# Altium PCB BTN7971b.PcbDoc
Units mil, origin at the board's own origin, x right, y up, seen from the top; angles counter-clockwise.
Board outline 1875.64 x 1422.35 mil, 2 copper layers (Top Layer, Bottom Layer); 32 components, 20 nets, 103 pads, 496 vias.
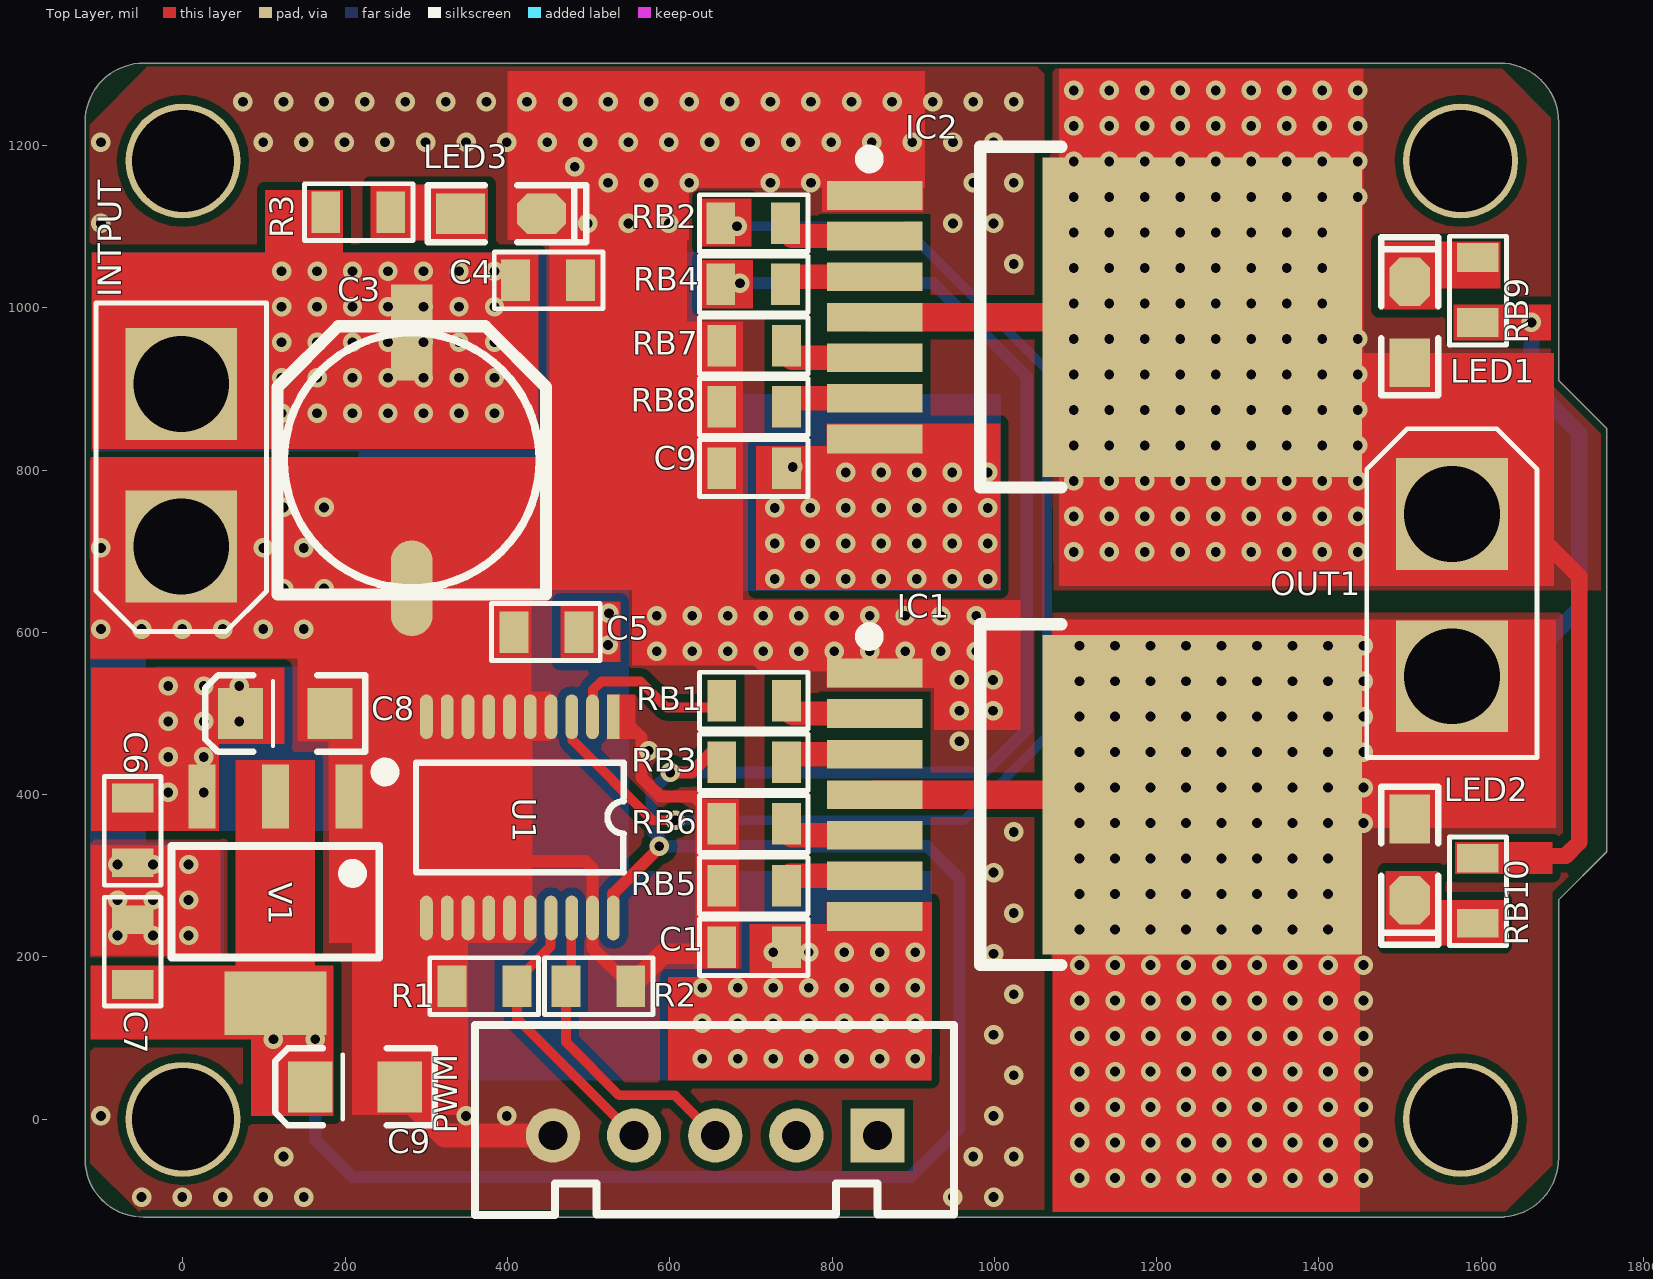
[diagram p0: Top Layer view]
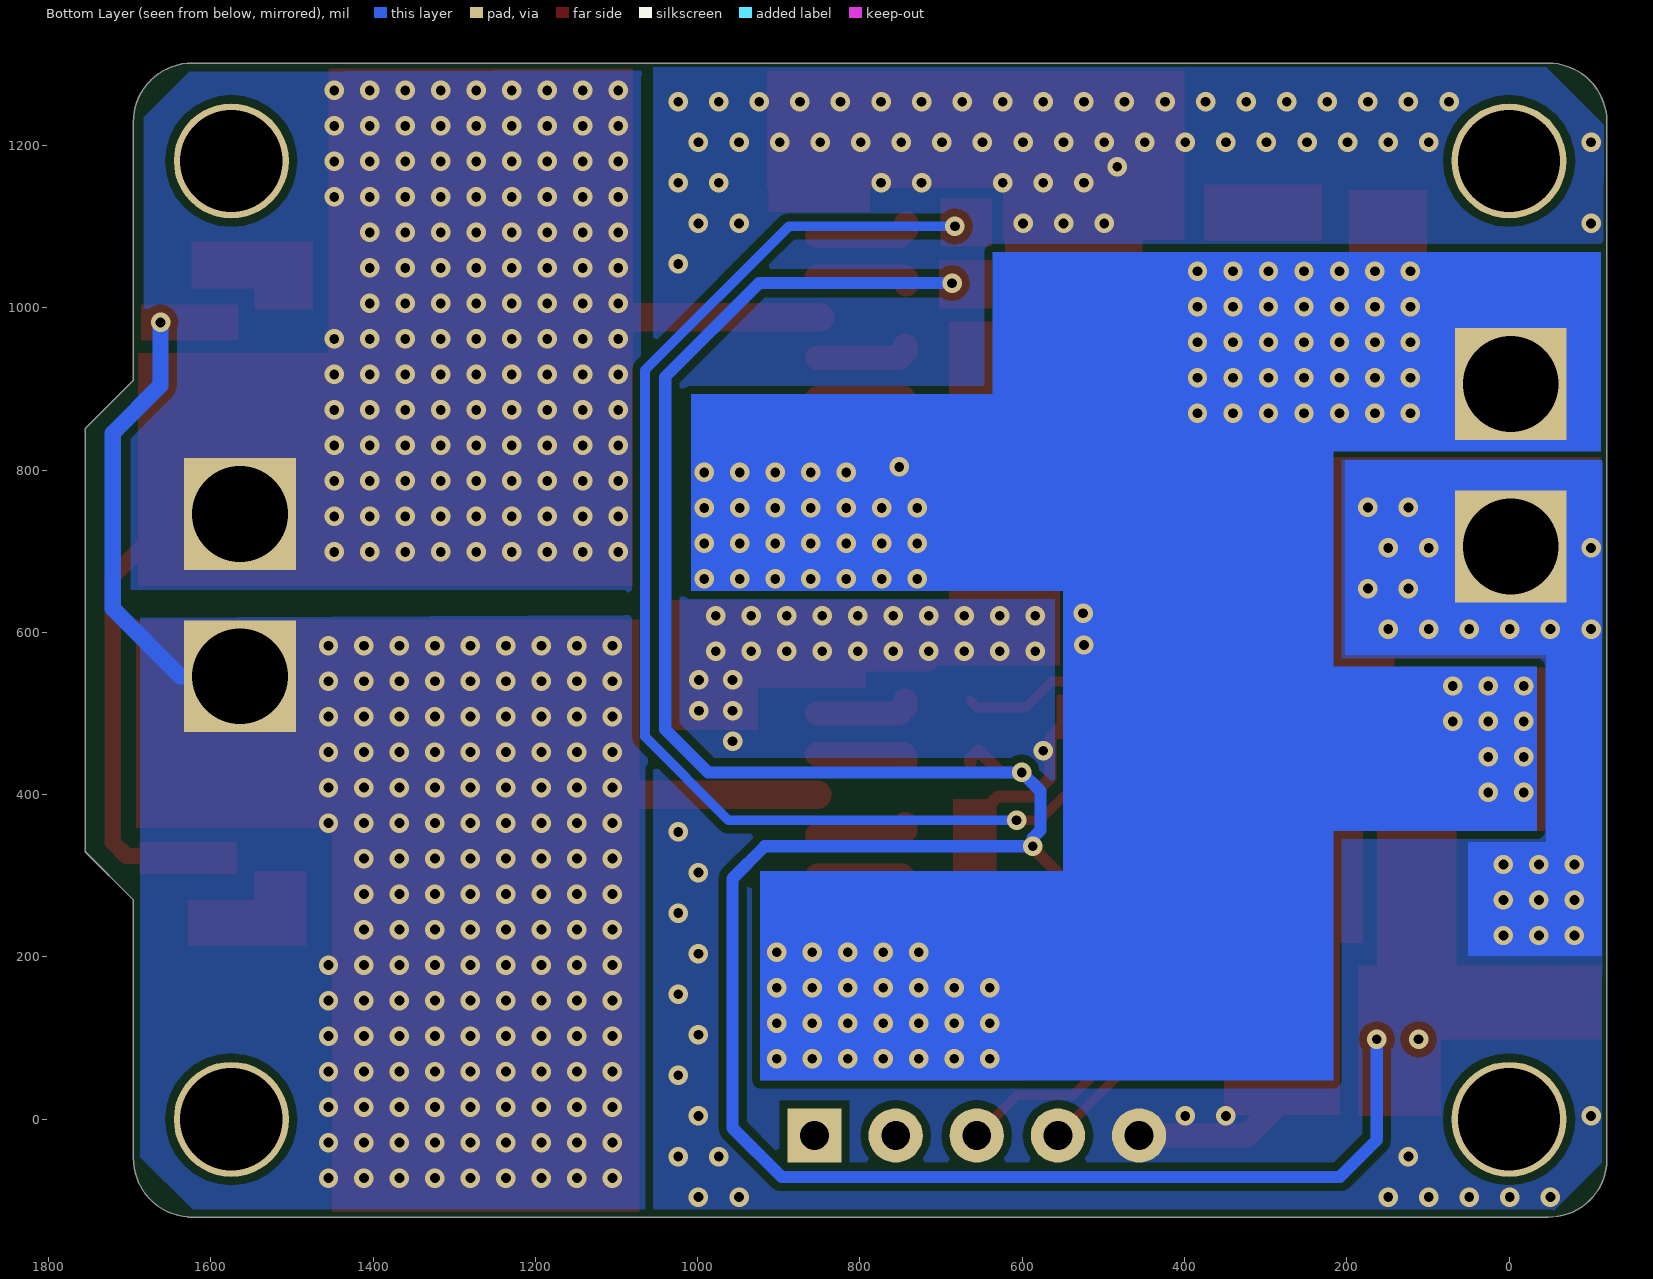
[diagram p1: Bottom Layer view, seen from below]
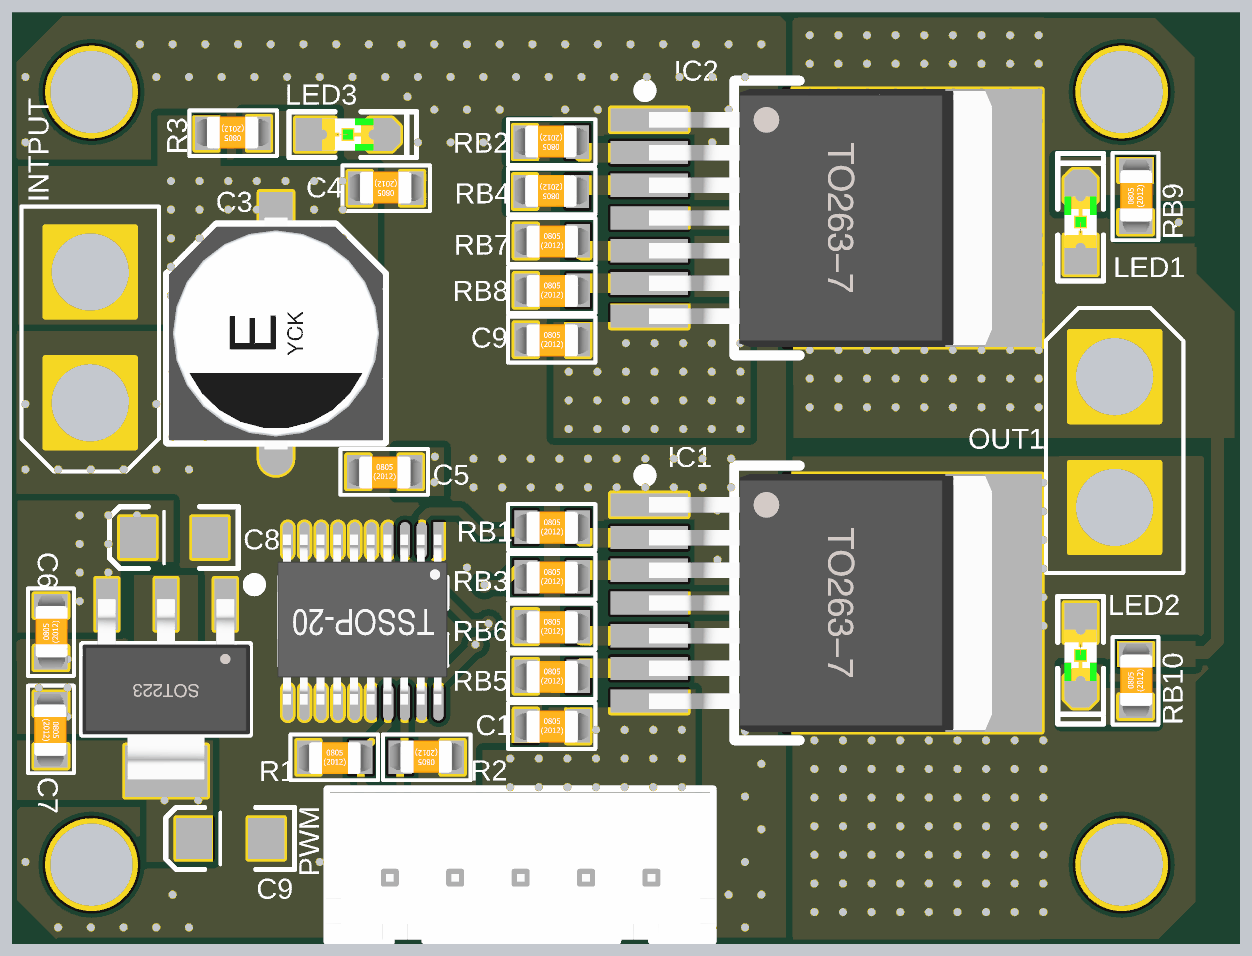
[diagram p2: 3D render of the assembled board from above, using the file's embedded part models]

## Layer stack, top to bottom
Top Solder: solder mask 0.4, Solder Resist, Dk 3.5
Top Layer: signal copper 1.4
Dielectric 1: dielectric 12.6, FR-4, Dk 4.8
Bottom Layer: signal copper 1.4
Bottom Solder: solder mask 0.4, Solder Resist, Dk 3.5

## Board outline
-48,-120.63 -47.98,-120.63 1622.67,-120.63 1627.69,-120.63 ccw(c1627.69,-118.11) 1628.8,-120.37 ccw(c1622.69,-47.89) 1695.43,-47.89 1695.43,270.29 1754.28,329.14 ccw(c1752.5,330.92) 1755.02,330.92 1755.02,850.19 ccw(c1752.5,850.19) 1754.28,851.96 1695.43,910.81 1695.43,1228.99 ccw(c1622.75,1229.05) 1695.43,1229.05 ccw(c1622.75,1229.05) 1622.81,1301.73 ccw(c1622.8,1299.21) 1622.8,1301.73 -47.89,1301.73 ccw(c-47.89,1228.99) -120.63,1228.99 -120.63,-50 ccw(c-118.11,-50) -120.62,-50.04 ccw(c-49,-49) -47.98,-120.63 ccw(c-49,-49)

## Design rules (kind name [scope] priority, off if disabled: settings)
Clearance [All] p1: gap=10 ignorepadtopadclearanceinfootprint=TRUE except(0: Arc-Hole Track-Hole SMDPad-Hole THPad-Hole Via-Hole Fill-Hole Poly-Hole Region-Hole Text-Hole)
DiffPairsRouting [All] p1: maxlimit=10 minlimit=8 mostfreqgap=10 toplayer_minwidth=15 toplayer_maxwidth=15 toplayer_prefwidth=15 bottomlayer_minwidth=15 bottomlayer_maxwidth=15 bottomlayer_prefwidth=15 maxuncoupledlength=500
PlaneClearance [All] p1: clearance=30
PlaneConnect [All] p1: planeconnectstyle=Direct reliefexpansion=20 reliefentries=4 reliefconductorwidth=30 reliefairgap=20
PolygonConnect [All] p1: connectstyle=Direct reliefconductorwidth=30 reliefentries=4 polygonreliefangle="90 Angle" airgapwidth=20
RoutingVias [All] p1: holewidth=24 width=36 viastyle="Through Hole" minholewidth=12 minwidth=18 maxholewidth=24 maxwidth=36
SolderMaskExpansion [All] p1: expansion=4
Width [All] p1: maxlimit=99999 minlimit=10 preferedwidth=20
27 further rules are at their usual default settings.

## Components (designator, comment, footprint, x,y, rotation, side; value= is the part's Value field where it differs from the comment)
C1 "0.1UF" "R/C 0805" 509,-18 r0 top
C3 "470UF/16V" "CM E(8*10.2)" 282,812 r90 top
C4 "10UF" "R/C 0805" 645,1264 r180 top
C5 "0.1UF" "R/C 0805" 253,370.5 r0 top
C6 "0.1UF" "R/C 0805" 168,161 r90 top
C7 "0.1UF" "R/C 0805" -292,401 r270 top
C8 "47uF" EIA3216 126,500 r180 top
C9 "47uF" EIA3216 212,40 r180 top
C9 "0.1UF" "R/C 0805" 509,572.5 r0 top
IC1 "BTS7970" TO263-7A 1266,400 r270 top locked
IC2 "BTS7970" TO263-7A 1266,988.5 r270 top locked
INTPUT "POWER" XT30 -2,906 r90 top
LED1 "红色" "LED 0805R" 1512,982.3 r90 top
LED2 "红色" "LED 0805R" 1512,320 r270 top
LED3 "红色" "LED 0805R" 392,1116 r0 top
OUT1 "POWER" XT30 1564,546 r270 top
PWM "HDR-1X5" XH2.54-LI-5P 656,-20 r180 top
R1 "10K" "R/C 0805" 176.7,-66 r0 top
R2 "10K" "R/C 0805" 707,394 r180 top
R3 "10K" "R/C 0805" 411,1348 r180 top
RB1 "4.7K" "R/C 0805" 509,286 r0 top
RB2 "4.7K" "R/C 0805" 897.74,1334.5 r180 top
RB3 "4.7K" "R/C 0805" 509,210 r0 top
RB4 "4.7K" "R/C 0805" 897.74,1259 r180 top
RB5 "470" "R/C 0805" 509,58 r0 top
RB6 "510" "R/C 0805" 509,134 r0 top
RB7 "510" "R/C 0805" 509,723.5 r0 top
RB8 "470" "R/C 0805" 509,648 r0 top
RB9 "10K" "R/C 0805" 1826,827 r90 top
RB10 "10K" "R/C 0805" 1826,86.56 r90 top
U1 "74LVC245" SOP-16 555.99,546.19 r270 top
V1 "AMS1117-5V" SOT223_N 114,268 r180 top

## Footprints (in the part's own frame and the unit in brackets; to place one, negate y for a bottom-side part, rotate by r counter-clockwise, add the part's x,y. Pads: shape width x height; smd on the part's side, far side on the other; paste and mask are expansions set on the pad)
"CM E(8*10.2)" [mm] "贴片电解电容，直径8mm，高10.2mm"
  rect 3x1.3 smd: 1(4,0)
  oval 3x1.3 smd: 2(-4,0)
  silkscreen extent -4.2,-4.2 4.2,4.2, body extent -4.5,-4.15 4.5,4.15, height 10.2
EIA3216 [mil] "EIA3216"
  rect 55.12x62.99 smd: A(55.12,0) C(-55.12,0)
  silkscreen extent -98,-47 98,47
"LED 0805R" [mil] "红色0805LED"
  rect 60x50 smd: 1(-50,0)
  oct 60x50 smd: 2(50,0)
  silkscreen extent -90,-35 105,35, body extent -39,-25 39,25, height 32
"R/C 0805" [mil]
  rect 35.43x51.18 smd: 1(155,230) 2(235,230)
  silkscreen extent 127,195 261,265, body extent 140,204 250,254, height 32
SOP-16 [mm]
  rect 1.4x0.4 smd: 1(1.274,-0.651)
  oval 1.4x0.4 smd: 2(1.274,-1.301) 3(1.274,-1.951) 4(1.274,-2.601) 5(1.274,-3.251) 6(1.274,-3.901) 7(1.274,-4.551) 8(1.274,-5.201) 9(1.274,-5.851) 10(1.274,-6.501) 11(7.574,-6.501) 12(7.574,-5.851) 13(7.574,-5.201) 14(7.574,-4.551) 15(7.574,-3.901) 16(7.574,-3.251) 17(7.574,-2.601) 18(7.574,-1.951) 19(7.574,-1.301) 20(7.574,-0.651)
  silkscreen extent 2.71,-6.83 6.14,-0.33, body extent 1.06,-6.91 7.66,-0.31, height 1.15
SOT223_N [mm] "6.4x7x1.6mm(长宽高)"
  rect 0.85x2 smd: 1(-2.3,-3.302) 2(0,-3.302) 3(2.3,-3.302)
  rect 3.2x2 smd: 2(0,3.175)
  silkscreen extent -3.63,-4.26 3.25,1.75, body extent -3.25,-3.51 3.25,3.51, height 1.65
TO263-7A [mm] "263，7脚晶体管"
  rect 0.9x3 smd: 1(-3.81,-10.5) 2(-2.54,-10.5) 3(-1.27,-10.5) 4(0,-10.5) 5(1.27,-10.5) 6(2.54,-10.5) 7(3.81,-10.5)
  rect 10x10 smd: 4(0,-0.254)
  silkscreen extent -5.33,-10.87 5.33,-4.66, body extent -5,-10.51 5,2.82, height 4.4
XH2.54-LI-5P [mm] "接插件，5P"
  rect 1.7x1.7 hole 0.9: 1(-5.08,0)
  round 1.7 hole 0.9: 2(-2.54,0) 3(0,0) 4(2.54,0) 5(5.08,0)
  silkscreen extent -7.48,-3.45 7.52,2.49, body extent -7.58,-3.3 7.58,2.4, height 7.03
XT30 [mm]
  rect 3.5x3.5 hole 3: 1(-5.08,0) 2(0,0)
  silkscreen extent -7.75,-2.67 2.54,2.67

## Part data
C1 C4 C5 C6 C7 C9: library part CAP
C3: library part C-CM, "贴片电解电容"
C8 C9: library part CAP_POL1206, "Capacitor PolarizedThese are standard SMD and PTH capacitors. Normally 10uF, 47uF, and 100uF in electrolytic and tantalum varieties. Always verify the external diameter of the through hole cap, it varies with capacity, voltage, and manufacturer. The EIA devices should be standard."
IC1 IC2: "电机驱动芯片", 学习资源=www.o
INTPUT OUT1: library part "Header 2 L"
LED1 LED2 LED3: library part LED-SMD, "贴片LED", 学习资源=www.o
PWM: library part "Header 5", "5P接插件", BOM名称=5, 学习资源=www.o
R1 R2 R3 RB1 RB2 RB3 RB4 RB5 RB6 RB7 RB8 RB9 RB10: library part RESISTER
V1: library part AMS1117, "三端稳压芯片", 学习资源=www.o

## Free pads (board coordinates)
  round 141.73 hole 125.98 unplated: 0(0,0) 0(0,1181.1) 0(1574.8,0) 0(1574.8,1181.1)

## Via types
v1: diameter 24, hole 12, Top Layer to Bottom Layer, tented both sides, 496 vias

## Nets (pads, with @x,y where several pads share a name; then routed paths per layer and width w, separated by ;. In a path a pad name is that pad's centre, name@x,y a point inside that pad or via, vN(x,y) a via of type N, cw(c..) or ccw(c..) an arc to the next point about the centre after c; other vN are vias at no path point)
GND: C1.1 C3.2 C4.1 C5.1 C6.1 C7.1 C8.C C9.1 C9.C IC1.1 IC2.1 INTPUT.1 LED3.2 PWM.5 R1.1 R2.1 RB5.1 RB6.1 RB7.1 RB8.1 U1.1 U1.4 U1.5 U1.6 U1.7 U1.8 U1.9 U1.10 U1.11 U1.12 U1.13 U1.14 U1.15 U1.16 U1.19 V1.1 | length 1776.7
  Top Layer w15: U1.11@296.79,248.5 U1.12@322.38,248.5 ; R1.1@328.44,164.5 328.44,222.55 322.38,228.61 U1.12@322.38,248.5 ; 357.5,304 371.5,318 495.99,318 504.77,309.21 U1.19 504.92,247.86 504.92,211.08 R2.1 ; U1.16@424.74,248.5 351.23,248.5 U1.12@322.38,248.5 ; U1.1 539.84,496.03 565,470.87 565,421.28 588.28,398 630,398 RB6.1 ; 532.5,1107.5 542,1107.5 607,1172.5 768.8,1172.5 776.3,1165 826.11,1165 IC2.1 ; 664,706 664,609.5 714.41,559.09 759,559.09 843.52,559.09 IC1.1
  Top Layer w25: R2.1 592.13,204.13 664,204.13 C1.1
  Top Layer w30: C9.C 267.12,36.07 323.19,-20 PWM.5
  other v1: -51,-95.9 -1,-95.9 49,-95.9 99,-95.9 149,-95.9 949,-95.9 999,-95.9 124,-45.9 974,-45.9 1024,-45.9 -101,4.1 349,4.1 399,4.1 999,4.1 1024,54.1 999,104.1 1024,154.1 999,204.1 -80.5,226.5 -36.75,226.5 7,226.5 1024,254.1 -80.5,270.25 -36.75,270.25 7,270.25 999,304.1 -80.5,314 -36.75,314 7,314 1024,354.1 574,454.1 957,466 957,503.5 998.5,503.5 957,541.5 998.5,541.5 584,576.75 627.75,576.75 671.5,576.75 715.25,576.75 759,576.75 802.75,576.75 846.5,576.75 890.25,576.75 934,576.75 977.75,576.75 -101,604.1 -51,604.1 -1,604.1 49,604.1 99,604.1 149,604.1 584,620.5 627.75,620.5 671.5,620.5 715.25,620.5 759,620.5 802.75,620.5 846.5,620.5 890.25,620.5 934,620.5 977.75,620.5 124,654.1 174,654.1 -101,704.1 99,704.1 149,704.1 124,754.1 174,754.1 1024,1054.1 -101,1104.1 499,1104.1 549,1104.1 599,1104.1 949,1104.1 999,1104.1 524,1154.1 574,1154.1 624,1154.1 724,1154.1 774,1154.1 974,1154.1 1024,1154.1 483,1174 -101,1204.1 99,1204.1 149,1204.1 199,1204.1 249,1204.1 299,1204.1 349,1204.1 399,1204.1 449,1204.1 499,1204.1 549,1204.1 599,1204.1 649,1204.1 699,1204.1 749,1204.1 799,1204.1 849,1204.1 899,1204.1 949,1204.1 999,1204.1 74,1254.1 124,1254.1 174,1254.1 224,1254.1 274,1254.1 324,1254.1 374,1254.1 424,1254.1 474,1254.1 524,1254.1 574,1254.1 624,1254.1 674,1254.1 724,1254.1 774,1254.1 824,1254.1 874,1254.1 924,1254.1 974,1254.1 1024,1254.1
NetIC1_2: IC1.2 RB1.2 | length 119.9
  Top Layer w30: RB1.2 744,508.13 752.13,500 IC1.2
NetIC1_3: IC1.3 RB3.2 | length 117
  Top Layer w30: RB3.2 744,447.28 746.72,450 IC1.3
NetIC1_4: IC1.4 LED2.1 OUT1.2 RB9.1 | length 1437.9
  Top Layer w20: IC1.4@1256,400 1286,370 LED2.1 1512,494 OUT1.2
  Top Layer w35: IC1.4@852.61,400 IC1.4@1256,400
  Bottom Layer w20: OUT1.2 1637.5,546 1721,629.5 1721,845.5 1662,904.5 v1(1662,982)
  other v1: 1105,-72.5 1148.75,-72.5 1192.5,-72.5 1236.25,-72.5 1280,-72.5 1323.75,-72.5 1367.5,-72.5 1411.25,-72.5 1455,-72.5 1105,-28.75 1148.75,-28.75 1192.5,-28.75 1236.25,-28.75 1280,-28.75 1323.75,-28.75 1367.5,-28.75 1411.25,-28.75 1455,-28.75 1105,15 1148.75,15 1192.5,15 1236.25,15 1280,15 1323.75,15 1367.5,15 1411.25,15 1455,15 1105,58.75 1148.75,58.75 1192.5,58.75 1236.25,58.75 1280,58.75 1323.75,58.75 1367.5,58.75 1411.25,58.75 1455,58.75 1105,102.5 1148.75,102.5 1192.5,102.5 1236.25,102.5 1280,102.5 1323.75,102.5 1367.5,102.5 1411.25,102.5 1455,102.5 1105,146.25 1148.75,146.25 1192.5,146.25 1236.25,146.25 1280,146.25 1323.75,146.25 1367.5,146.25 1411.25,146.25 1455,146.25 1105,190 1148.75,190 1192.5,190 1236.25,190 1280,190 1323.75,190 1367.5,190 1411.25,190 1455,190 1105,233.75 1148.75,233.75 1192.5,233.75 1236.25,233.75 1280,233.75 1323.75,233.75 1367.5,233.75 1411.25,233.75 1105,277.5 1148.75,277.5 1192.5,277.5 1236.25,277.5 1280,277.5 1323.75,277.5 1367.5,277.5 1411.25,277.5 1105,321.25 1148.75,321.25 1192.5,321.25 1236.25,321.25 1280,321.25 1323.75,321.25 1367.5,321.25 1411.25,321.25 1105,365 1148.75,365 1192.5,365 1236.25,365 1280,365 1323.75,365 1367.5,365 1411.25,365 1455,365 1105,408.75 1148.75,408.75 1192.5,408.75 1236.25,408.75 1280,408.75 1323.75,408.75 1367.5,408.75 1411.25,408.75 1455,408.75 1105,452.5 1148.75,452.5 1192.5,452.5 1236.25,452.5 1280,452.5 1323.75,452.5 1367.5,452.5 1411.25,452.5 1455,452.5 1105,496.25 1148.75,496.25 1192.5,496.25 1236.25,496.25 1280,496.25 1323.75,496.25 1367.5,496.25 1411.25,496.25 1455,496.25 1105,540 1148.75,540 1192.5,540 1236.25,540 1280,540 1323.75,540 1367.5,540 1411.25,540 1455,540 1105,583.75 1148.75,583.75 1192.5,583.75 1236.25,583.75 1280,583.75 1323.75,583.75 1367.5,583.75 1411.25,583.75 1455,583.75
NetIC1_5: IC1.5 RB6.2 | length 119
  Top Layer w30: RB6.2 744,356.13 750.13,350 IC1.5
NetIC1_6: IC1.6 RB5.2 | length 118.2
  Top Layer w30: RB5.2 744,295.87 748.13,300 IC1.6
NetIC2_2: IC2.2 RB2.1 | length 121.1
  Top Layer w30: RB2.1 742.74,1096.63 750.87,1088.5 IC2.2
NetIC2_3: IC2.3 RB4.1 | length 117.8
  Top Layer w30: RB4.1 742.74,1035.78 745.46,1038.5 IC2.3
NetIC2_4: IC2.4 LED1.1 OUT1.1 RB10.2 | length 1476.9
  Top Layer w20: IC2.4@1252.5,988.5 1308.7,932.3 LED1.1 1512,798 OUT1.1 1589,721 1669,721 1721,669 1721,341.5 1704,324.5 1661.5,324.5
  Top Layer w35: IC2.4@849.11,988.5 852.61,988.5 IC2.4@1252.5,988.5
  other v1: 1098,699.25 1141.75,699.25 1185.5,699.25 1229.25,699.25 1273,699.25 1316.75,699.25 1360.5,699.25 1404.25,699.25 1448,699.25 1098,743 1141.75,743 1185.5,743 1229.25,743 1273,743 1316.75,743 1360.5,743 1404.25,743 1448,743 1098,786.75 1141.75,786.75 1185.5,786.75 1229.25,786.75 1273,786.75 1316.75,786.75 1360.5,786.75 1404.25,786.75 1448,786.75 1098,830.5 1141.75,830.5 1185.5,830.5 1229.25,830.5 1273,830.5 1316.75,830.5 1360.5,830.5 1404.25,830.5 1448,830.5 1098,874.25 1141.75,874.25 1185.5,874.25 1229.25,874.25 1273,874.25 1316.75,874.25 1360.5,874.25 1404.25,874.25 1448,874.25 1098,918 1141.75,918 1185.5,918 1229.25,918 1273,918 1316.75,918 1360.5,918 1404.25,918 1448,918 1098,961.75 1141.75,961.75 1185.5,961.75 1229.25,961.75 1273,961.75 1316.75,961.75 1360.5,961.75 1404.25,961.75 1448,961.75 1098,1005.5 1141.75,1005.5 1185.5,1005.5 1229.25,1005.5 1273,1005.5 1316.75,1005.5 1360.5,1005.5 1404.25,1005.5 1098,1049.25 1141.75,1049.25 1185.5,1049.25 1229.25,1049.25 1273,1049.25 1316.75,1049.25 1360.5,1049.25 1404.25,1049.25 1098,1093 1141.75,1093 1185.5,1093 1229.25,1093 1273,1093 1316.75,1093 1360.5,1093 1404.25,1093 1098,1136.75 1141.75,1136.75 1185.5,1136.75 1229.25,1136.75 1273,1136.75 1316.75,1136.75 1360.5,1136.75 1404.25,1136.75 1448,1136.75 1098,1180.5 1141.75,1180.5 1185.5,1180.5 1229.25,1180.5 1273,1180.5 1316.75,1180.5 1360.5,1180.5 1404.25,1180.5 1448,1180.5 1098,1224.25 1141.75,1224.25 1185.5,1224.25 1229.25,1224.25 1273,1224.25 1316.75,1224.25 1360.5,1224.25 1404.25,1224.25 1448,1224.25 1098,1268 1141.75,1268 1185.5,1268 1229.25,1268 1273,1268 1316.75,1268 1360.5,1268 1404.25,1268 1448,1268
NetIC2_5: IC2.5 RB7.2 | length 119.4
  Top Layer w30: RB7.2 744,945.63 751.13,938.5 IC2.5
NetIC2_6: IC2.6 RB8.2 | length 117.5
  Top Layer w30: RB8.2 744,885.78 746.72,888.5 IC2.6
NetLED1_2: LED1.2 RB9.2
NetLED2_2: LED2.2 RB10.1
NetLED3_1: LED3.1 R3.1
PWM-0UT1: RB1.1 U1.2 | length 213.3
  Top Layer w12: U1.2 505.49,496.75 505.49,529.49 515.59,539.59 564.04,539.59 596.13,507.5 655.5,507.5 RB1.1
PWM-0UT2: RB2.2 U1.3 | length 1604.8
  Top Layer w12: U1.3 479.9,495.31 479.9,467.46 578.86,368.5 v1(607,368.5)
  Bottom Layer w12: v1(607,368.5) 962,368.5 1065,471.5 1065,923.23 887.73,1100.5 v1(683,1100.5)
PWM-IN1: PWM.3 R2.2 U1.18 | length 387.5
  Top Layer w12: U1.18 478.46,247.28 478.46,170.46 R2.2 472,95.11 537.65,29.46 606.54,29.46 PWM.3
PWM-IN2: PWM.4 R1.2 U1.17 | length 345.1
  Top Layer w12: U1.17 452.87,247.28 452.87,213.05 411.7,171.87 R1.2 411.7,124.3 PWM.4
VCC: C1.2 C3.1 C4.2 C5.2 C6.2 C8.A C9.2 IC1.7 IC2.7 INTPUT.2 R3.2 V1.3
  other v1: 640,74.75 683.75,74.75 727.5,74.75 771.25,74.75 815,74.75 858.75,74.75 902.5,74.75 640,118.5 683.75,118.5 727.5,118.5 771.25,118.5 815,118.5 858.75,118.5 902.5,118.5 640,162.25 683.75,162.25 727.5,162.25 771.25,162.25 815,162.25 858.75,162.25 902.5,162.25 727.5,206 771.25,206 815,206 858.75,206 902.5,206 -18,402.75 25.75,402.75 -18,446.5 25.75,446.5 -18,490.25 25.75,490.25 69.5,490.25 -18,534 25.75,534 69.5,534 524,584.5 525,623.5 729.5,666 773.25,666 817,666 860.75,666 904.5,666 948.25,666 992,666 729.5,709.75 773.25,709.75 817,709.75 860.75,709.75 904.5,709.75 948.25,709.75 992,709.75 729.5,753.5 773.25,753.5 817,753.5 860.75,753.5 904.5,753.5 948.25,753.5 992,753.5 817,797.25 860.75,797.25 904.5,797.25 948.25,797.25 992,797.25 751.5,804 121.5,870 165.25,870 209,870 252.75,870 296.5,870 340.25,870 384,870 121.5,913.75 165.25,913.75 209,913.75 252.75,913.75 296.5,913.75 340.25,913.75 384,913.75 121.5,957.5 165.25,957.5 209,957.5 252.75,957.5 296.5,957.5 340.25,957.5 384,957.5 121.5,1001.25 165.25,1001.25 209,1001.25 252.75,1001.25 296.5,1001.25 340.25,1001.25 384,1001.25 121.5,1045 165.25,1045 209,1045 252.75,1045 296.5,1045 340.25,1045 384,1045
VCC-5v: C7.2 C9.A RB3.1 RB4.2 U1.20 V1.2 | length 3252.6
  Top Layer w15: U1.20 530.36,277.86 587,334.5 v1(587,336.5) ; v1(600.5,427.5) 626.78,427.5 653.78,454.5 664,444.28 RB3.1
  Bottom Layer w15: v1(163,98.5) 163,-25.5 208.46,-70.96 896.71,-70.96 957,-10.68 957,296.75 917.25,336.5 v1(587,336.5) 587,346.78 577.5,356.28 577.5,404.5 v1(600.5,427.5) 987,427.5 1040,480.5 1040,915 924.5,1030.5 v1(686.5,1030.5)
  other v1: 111.5,98.5
pads on no net: PWM.1 PWM.2

## Polygon pours and split planes (outlines as drawn)
NetIC1_4 on Top Layer "Top Layer-NetIC1_4" (solid, remove dead copper, pour order 22): 1070,624 1070,-112.5 1072,-114.5 1073,-113.5 1630.5,-113.5 1687.5,-56.5 1687.5,279.5 1747.5,339.5 1747.5,624.5
NetIC2_4 on Top Layer "Top Layer-NetIC2_4" (solid, remove dead copper, pour order 20): 1073.5,651 1074.5,652 1747.5,652 1747.5,845 1686,906.5 1686,1234.5 1626,1294.5 1067.5,1294.5
GND on Top Layer "Top Layer-GND" (solid, remove dead copper, pour order 6): -114,-16.5 -114,-54 -54,-114 -51.5,-111.5 1061.5,-111.5 1061.5,1288.5 1053,1297 -44,1297 -115,1226 -115,1213.5
no net on Top Layer "Top Layer-No Net" (solid, pour order 0): 222.5,358.5
NetIC1_4 on Bottom Layer "Bottom Layer-NetIC1_4" (solid, remove dead copper, pour order 14): 1091,621 1084.5,621 1054.5,591 1054.5,-111 1622.5,-111 1688,-45.5 1687,-44.5 1687,618
NetIC2_4 on Bottom Layer "Bottom Layer-NetIC2_4" (solid, remove dead copper, pour order 12): 1063,1293 1070,1286 1070,662.5 1084.5,648 1089,652.5 1699,652.5 1699,854.5 1700.5,856 1682.5,874 1682.5,1235 1626.5,1291 1615.5,1291
GND on Bottom Layer "Bottom Layer-GND" (solid, pour order 10): 1088,1294.5
GND on Bottom Layer "Bottom Layer-GND 1" (solid, remove dead copper, pour order 8): -114,-36.5 -114,-53.5 -55,-112.5 -53.5,-111 1054.5,-111 1054.5,1296.5 -46,1296.5 -116.5,1226

## Other copper
Top Layer:
  rectangle net NetIC1_4: 1072,359 1692,616
  rectangle net NetIC1_4: 1072,-114.5 1450.5,616
  rectangle net NetIC2_4: 1079.5,657.5 1689.5,944.5
  rectangle net NetIC2_4: 1079.5,657.5 1455,1295
  rectangle net GND: 787.5,1118 913,1262.5
  rectangle net GND: 400,1148 914.5,1292
  rectangle net GND: 400,1083.5 623.5,1262.5
  rectangle net GND: 925.5,479.5 1032.5,631.5
  rectangle net GND: 793,531.5 1032.5,631.5
  rectangle net GND: 553.5,559.5 1032.5,640
  rectangle net GND: 553.5,559 690,983.5
  rectangle net VCC: 706,652 994,829.5
  rectangle net VCC: 793,652 1007.5,857.5
  rectangle net VCC: 598,48 922.5,175.5
  rectangle net GND: 523,468.5 557.5,523.5
  rectangle net GND: 632,186 685.5,394.5
  rectangle net VCC-5v: 637,999.5 702.5,1059
  rectangle net PWM-0UT2: 637,1075.5 700.5,1134.5
  rectangle net GND: 451.5,652.5 621,1145.5
  rectangle net GND: 514,652.5 690,983.5
  rectangle net GND: 400,1083.5 506.5,1145.5
  rectangle net GND: 453,1011.5 506.5,1145.5
  rectangle net NetLED3_1: 231,1083 376,1152
  rectangle net VCC: 101,828 197,1145.5
  rectangle net VCC: 465.5,563.5 539,638
  rectangle net VCC: 698.5,88.5 922.5,240.5
  rectangle net VCC: 793,80.5 923,268
  rectangle net GND: -114,654.52 690,816
  rectangle net GND: 180,217 431,466
  rectangle net GND: 208.5,5 351.5,813.5
  rectangle net GND: 386,466 453.59,527.5
  rectangle net GND: 181.12,356.5 429.5,652
  rectangle net GND: 286.5,217 431,278.5
  rectangle net GND: 286.5,137 350.5,278.5
  rectangle net VCC-5v: 65,98.5 163,443
  rectangle net VCC-5v: -114,98.5 185.5,189.5
  rectangle net VCC-5v: 84,4 185.5,184.5
  rectangle net GND: -113.5,202 46.5,338
  rectangle net VCC: -113,355 44.5,556.5
  rectangle net VCC: 4.5,462.5 125,556.5
  rectangle net VCC: 4.5,358.5 44.5,538.5
  rectangle net GND: 179.5,358.5 226.5,815.5
  rectangle net GND: 141.5,465.5 212,816
  rectangle net NetIC1_4: 1566,960 1686,1004
  rectangle net NetIC2_4: 1568,302 1688,342
  rectangle net NetLED1_2: 1474,998 1546,1082
  rectangle net NetLED1_2: 1474,1024 1624,1082
  rectangle net NetLED2_2: 1482,214 1546,306
  rectangle net NetLED2_2: 1482,214 1628,270
  rectangle net GND: -114,568 429.5,816
  rectangle net VCC: -112,826 438,1068
Bottom Layer:
  rectangle net GND: -114.5,201.5 50.5,341.5
  rectangle net GND: -114.5,201.5 -45.5,812.5
  rectangle net GND: -114.5,572 202,812.5
  rectangle net VCC: -34.5,355.5 315.5,558
  rectangle net VCC: 419,48 923,306
  rectangle net VCC: 216.5,651 1008,894
  rectangle net VCC: 216.5,48 549.5,1069
  rectangle net VCC: -113,823 636.5,1069

## Silkscreen, mask and mechanical layers (free items; w line width, h text height)
Drill Drawing:
  lines w5: 1622.69,-118.11 ccw(c1622.69,-47.89) 1692.91,-47.89 1692.91,271.33 1752.5,330.92 1752.5,850.19 1692.91,909.77 1692.91,1228.99 ccw(c1622.75,1229.05) 1622.8,1299.21 -47.89,1299.21 ccw(c-47.89,1228.99) -118.11,1228.99 -118.11,-50 ccw(c-49,-49) -48,-118.11 1627.69,-118.11